# Altium PCB PCB1.PcbDoc
Units mil, origin at the board's own origin, x right, y up, seen from the top; angles counter-clockwise.
Board outline 1535 x 1330 mil, 2 copper layers (Top Layer, Bottom Layer); 30 components, 59 nets, 184 pads, 33 vias.
Unrouted connection lines stored in the file: 19.
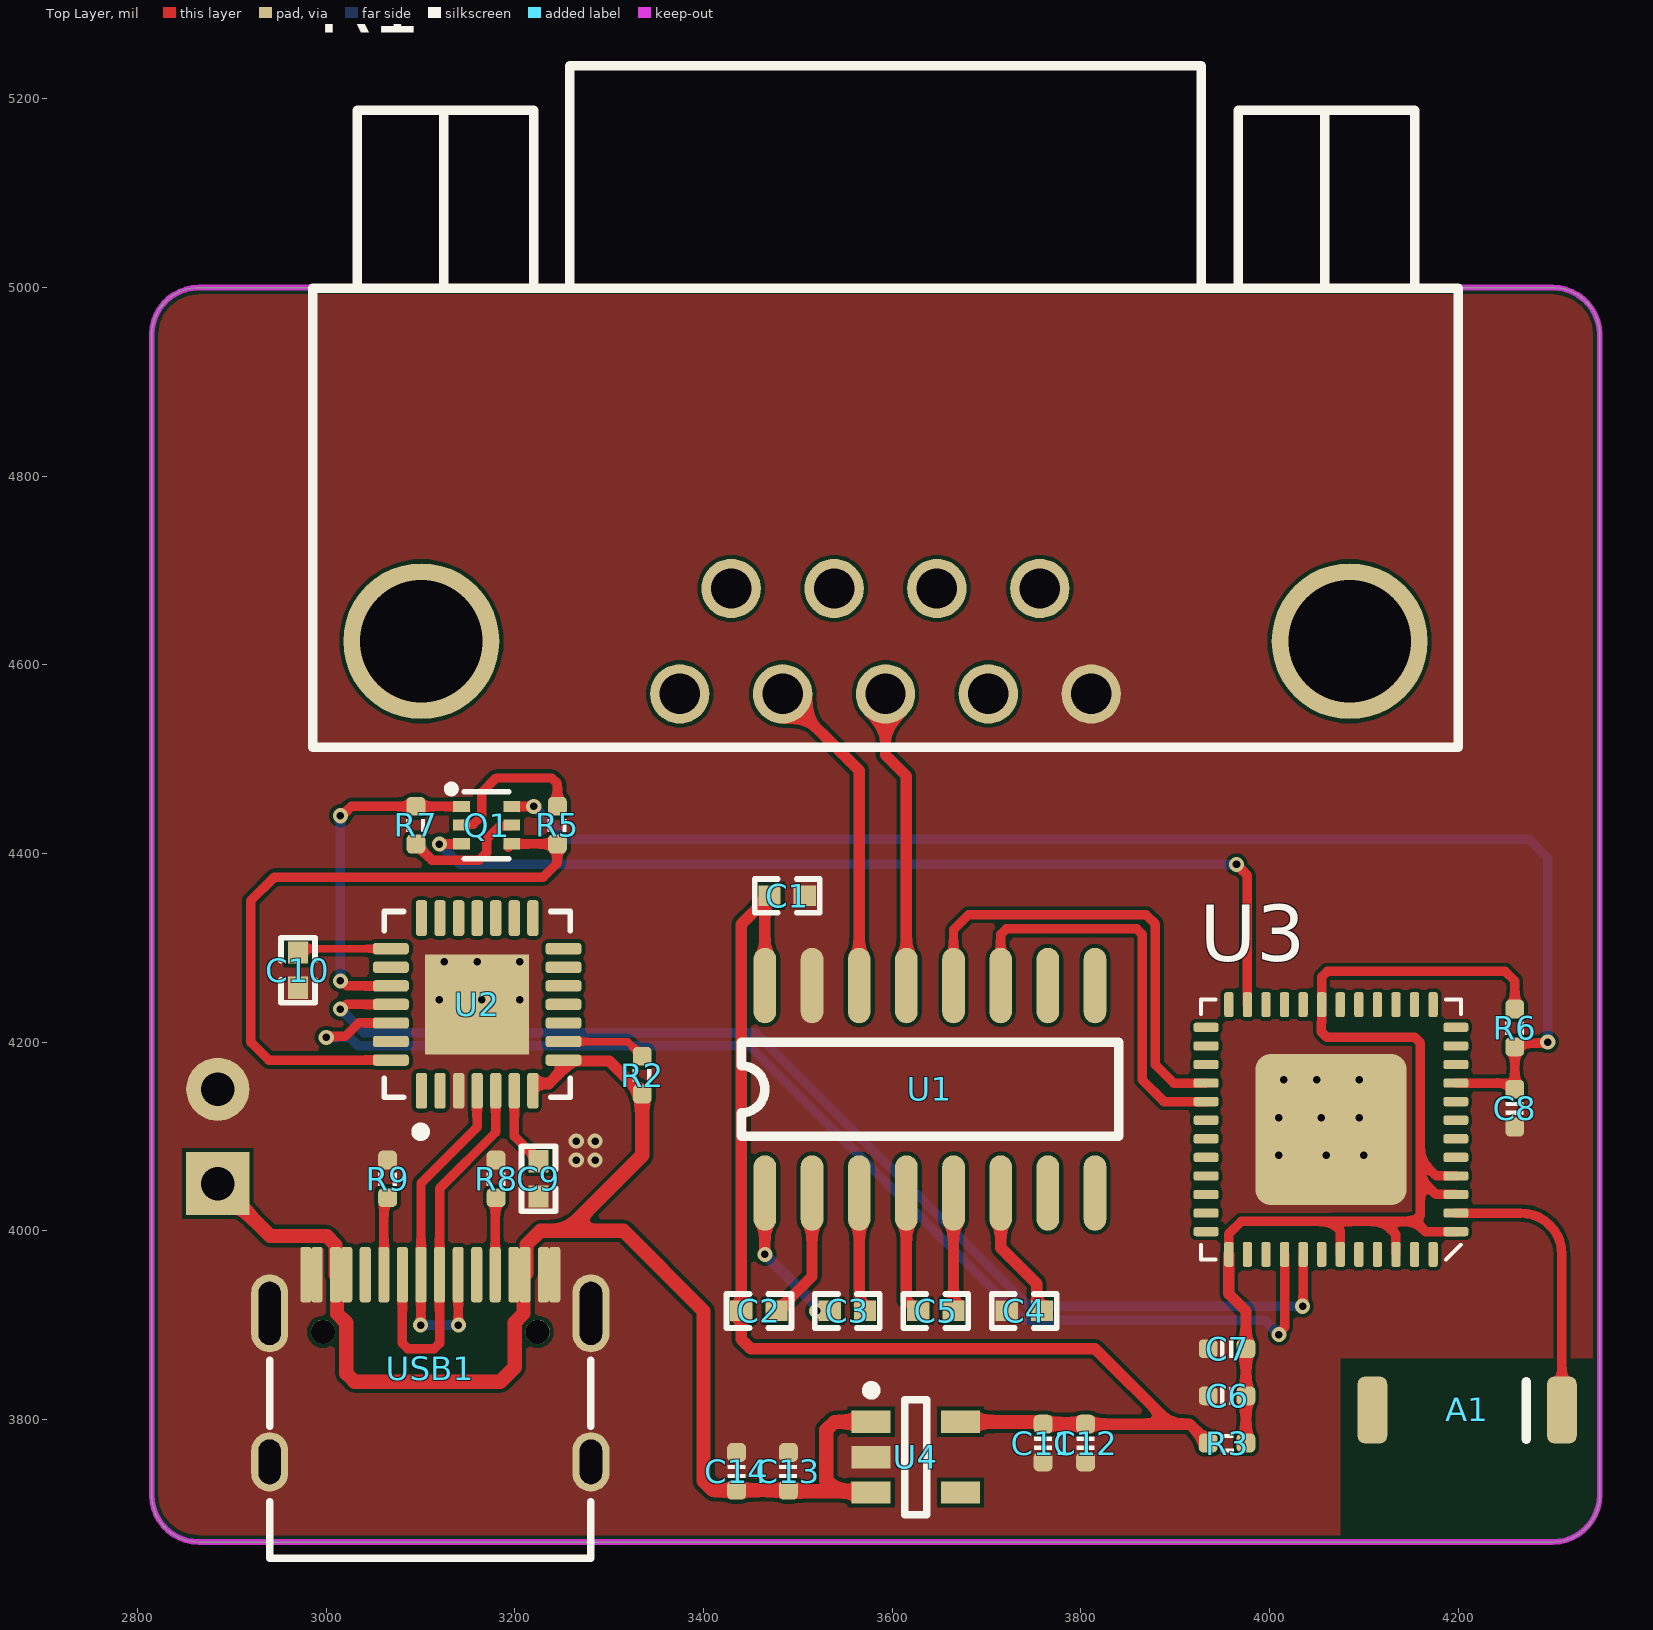
[diagram p0: Top Layer view]
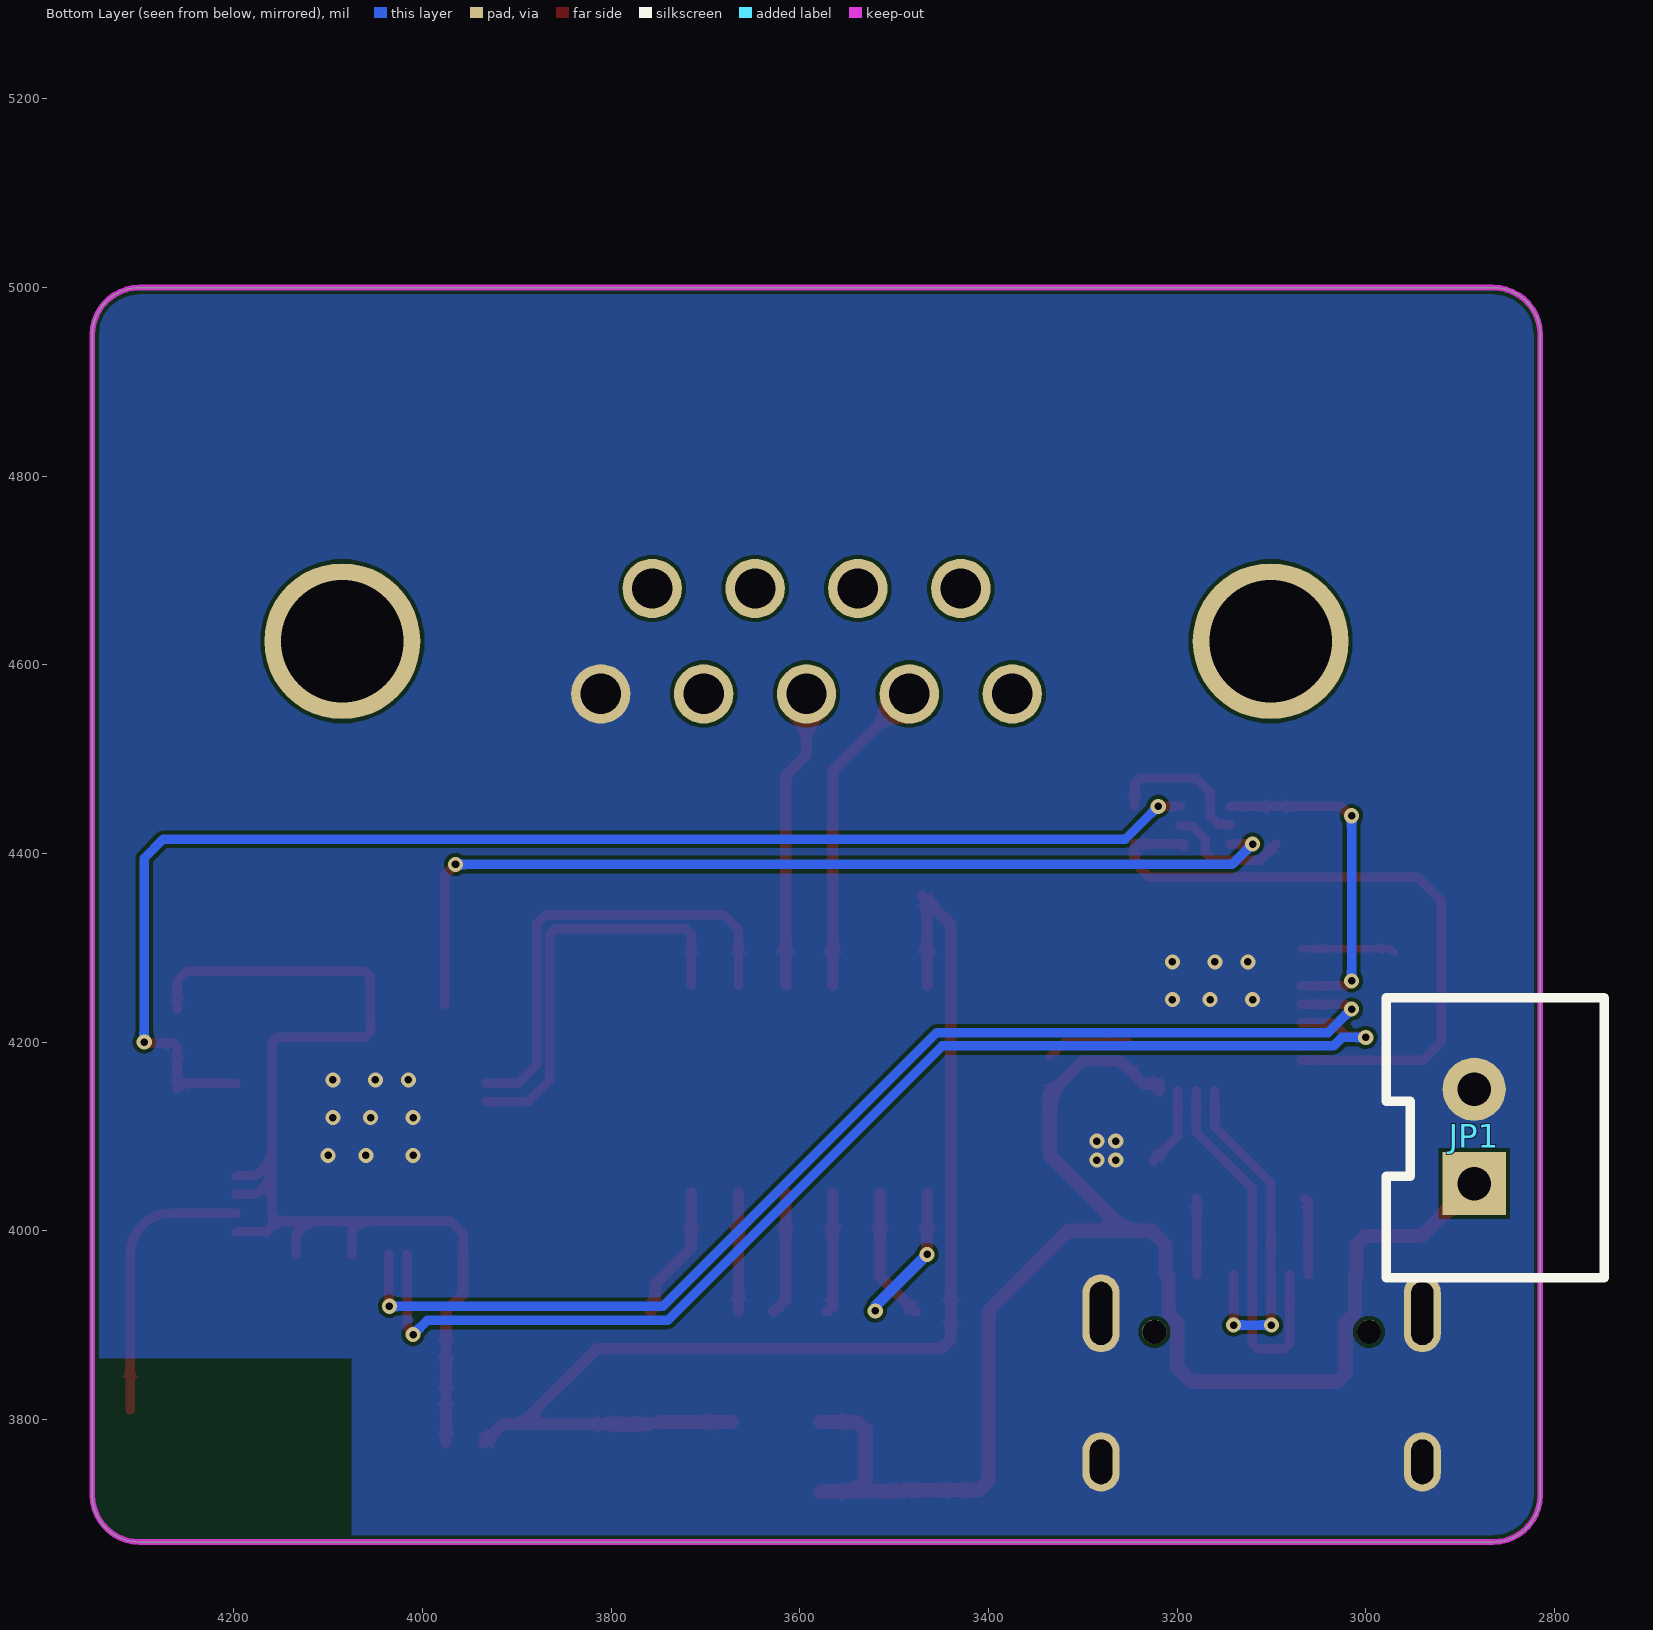
[diagram p1: Bottom Layer view, seen from below]
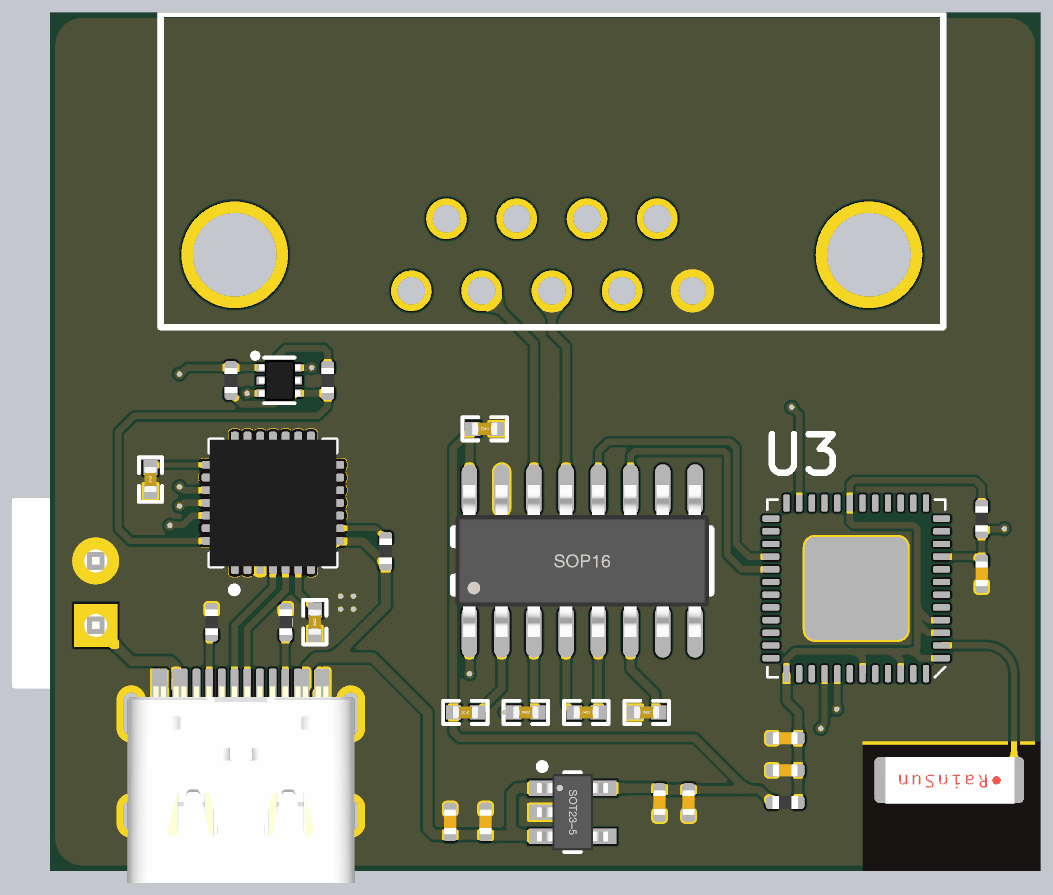
[diagram p2: 3D render of the assembled board from above, using the file's embedded part models]

## Layer stack, top to bottom
Top Solder: solder mask 0.4, Solder Resist, Dk 3.5
Top Layer: signal copper 1.4
Dielectric 1: dielectric 12.6, FR-4, Dk 4.8
Bottom Layer: signal copper 1.4
Bottom Solder: solder mask 0.4, Solder Resist, Dk 3.5

## Board outline
2815,3720 2815,4950 cw(c2865,4950) 2865,5000 4300,5000 cw(c4300,4950) 4350,4950 4350,3720 cw(c4300,3720) 4300,3670 2865,3670 cw(c2865,3720)

## Design rules (kind name [scope] priority, off if disabled: settings)
Clearance [All] p1: gap=4 ignorepadtopadclearanceinfootprint=FALSE
ComponentClearance [All] p1: gap=0 collisioncheckmode=3 verticalgap=0 showdistances=FALSE
DiffPairsRouting [All] p1: maxlimit=9 minlimit=9 mostfreqgap=9 toplayer_minwidth=4 toplayer_maxwidth=4 toplayer_prefwidth=4 bottomlayer_minwidth=4 bottomlayer_maxwidth=4 bottomlayer_prefwidth=4 maxuncoupledlength=500
FanoutControl Fanout_BGA [All] p1: bgadir=Out bgaviamode=Centered fanoutstyle=Auto fanoutdirection=Alternating viagrid=1 // Fanout_BGA (Default Rule)
HoleSize [All] p1: absolutevalues=TRUE maxlimit=10000 minlimit=8 maxpercent=80.000 minpercent=20.000
MinimumSolderMaskSliver [All] p1 off: minsoldermaskwidth=2
PlaneClearance [All] p1: clearance=8
PlaneConnect [All] p1: planeconnectstyle=Direct reliefexpansion=20 reliefentries=4 reliefconductorwidth=10 reliefairgap=10
PolygonConnect [All] p1: connectstyle=Direct reliefconductorwidth=10 reliefentries=4 polygonreliefangle="90 Angle" airgapwidth=10
RoutingVias [All] p1: holewidth=8 width=16 viastyle="Through Hole" minholewidth=6 minwidth=12 maxholewidth=28 maxwidth=50
SilkToSilkClearance [All] p1: silktosilkclearance=0
SilkToSolderMaskClearance [IsPad] p1: minsilkscreentomaskgap=0 clearancetoexposedcopper=TRUE
SolderMaskExpansion [All] p1: expansion=3 istentingtop=FALSE
Width [All] p1: maxlimit=10000 minlimit=4 preferedwidth=4
21 further rules are at their usual default settings.

## Components (designator, comment, footprint, x,y, rotation, side; value= is the part's Value field where it differs from the comment)
A1 "RAINSUN" ANT-Rainsun-AN5120 4210,3810 r180 top
C1 "1uf" C0402_M 3488.7,4355 r180 top
C2 "1uf" C0402_M 3458.7,3915 r180 top
C3 "1uf" C0402_M 3552.47,3915 r0 top
C4 "1uf" C0402_M 3740,3915 r0 top
C5 "1uf" C0402_M 3646.23,3915 r0 top
C6 "10uF" CAP_0402 3955,3825 r0 top value=0.1u
C7 "0.1uF" CAP_0402 3955,3875 r0 top value=0.1u
C8 "1uF" CAP_0402 4260,4130 r270 top value=0.1u
C9 "0.1uf" C0402_M 3225,4055 r90 top
C10 "0.1uf" C0402_M 2970,4276.3 r90 top
C11 "0.1uF" CAP_0402 3760,3775 r90 top value=0.1u
C12 "10uF" CAP_0402 3805,3775 r90 top value=0.1u
C13 "0.1uF" CAP_0402 3490,3745 r90 top value=0.1u
C14 "10uF" CAP_0402 3435,3745 r90 top value=0.1u
JP1 "HDR-1X2" XH2.54-LI-2P 2885,4100 r90 bottom
Q1 "BC847BVC-7" SOT563-6 3170,4430 r270 top
R1 "DB9-90-公" DSUB-TH_FDB0901-M0DB300K6KF 3592.87,4625.01 r180 top
R2 "10K" RES_0402 3335,4165 r90 top value=22R
R3 "0R" RES_0402 3955,3775 r0 top value=22R
R5 "12K" RES_0402 3245,4430 r90 top value=22R
R6 "10K" RES_0402 4260,4215 r270 top value=22R
R7 "12K" RES_0402 3095,4430 r270 top value=22R
R8 "5.1K" RES_0402 3180,4055 r270 top value=22R
R9 "5.1K" RES_0402 3065,4055 r90 top value=22R
U1 "MAX232" SO16 3640,4150 r90 top
U2 "9102" QFN-28 3160,4240 r90 top locked value=Value
U3 "ESP32_SIP" QFN-48_7X7 4065.16,4107.38 r180 top locked
U4 "LP2992 3V3" SOT23-5 3625,3760 r0 top
USB1 "Type-C" Type-C-TOP 3110.28,3854.21 r270 top

## Footprints (in the part's own frame and the unit in brackets; to place one, negate y for a bottom-side part, rotate by r counter-clockwise, add the part's x,y. Pads: shape width x height; smd on the part's side, far side on the other; paste and mask are expansions set on the pad)
ANT-Rainsun-AN5120 [mm] "选择焊盘"
  rrect50% 0.8x1.8 smd: 1(-2.54,0) ""(2.563,0)
  silkscreen extent -1.57,-0.76 -1.57,0.79, body extent -2.57,-0.91 2.54,0.94, height 1.32
C0402_M [mm] "贴片MLCC电容"
  rect 0.6x0.55 smd: 1(-0.475,0) 2(0.475,0)
  silkscreen extent -0.87,-0.46 0.87,0.46, body extent -0.5,-0.25 0.5,0.25, height 0.5
CAP_0402 [mil]
  rrect50% 20x20 smd: 1(-20,0) 2(20,0)
  silkscreen extent -6,-9 6,9, body extent -20,-10 20,10, height 20
DSUB-TH_FDB0901-M0DB300K6KF [mm]
  round 1.6 hole 1.09 mask+0.05: 1(-5.54,1.42) 2(-2.77,1.42) 3(0,1.42) 4(2.77,1.42) 5(5.54,1.42) 6(-4.155,-1.42) 7(-1.385,-1.42) 8(1.385,-1.42) 9(4.155,-1.42)
  round 4.2 hole 3.3 mask+0.05: 10(12.5,0) 11(-12.5,0)
  silkscreen extent -15.42,-15.5 15.42,2.85
QFN-28 [mil]
  rrect50% 38x12 smd mask+5: 1(-91.5,59.06) 2(-91.5,39.37) 3(-91.5,19.68) 4(-91.5,0) 5(-91.5,-19.68) 6(-91.5,-39.37) 7(-91.5,-59.06) 15(91.5,-59.06) 16(91.5,-39.37) 17(91.5,-19.68) 18(91.5,0) 19(91.5,19.68) 20(91.5,39.37) 21(91.5,59.06)
  rrect50% 12x38 smd mask+5: 8(-59.06,-91.5) 9(-39.37,-91.5) 10(-19.69,-91.5) 11(0,-91.5) 12(19.69,-91.5) 13(39.37,-91.5) 14(59.06,-91.5) 22(59.06,91.5) 23(39.37,91.5) 24(19.69,91.5) 25(0,91.5) 26(-19.69,91.5) 27(-39.37,91.5) 28(-59.06,91.5)
  rect 106.3x110.24 smd mask+3: 29(0,0)
  silkscreen extent -140,-98 98,98, body extent -99,-99 98,98, height 35
QFN-48_7X7 [mm]
  rrect50% 0.675x0.25 smd: 1(-3.363,2.75) 2(-3.363,2.25) 3(-3.363,1.75) 4(-3.363,1.25) 5(-3.363,0.75) 6(-3.363,0.25) 7(-3.363,-0.25) 8(-3.363,-0.75) 9(-3.363,-1.25) 10(-3.363,-1.75) 11(-3.363,-2.25) 12(-3.363,-2.75) 25(3.363,-2.75) 26(3.363,-2.25) 27(3.363,-1.75) 28(3.363,-1.25) 29(3.363,-0.75) 30(3.363,-0.25) 31(3.363,0.25) 32(3.363,0.75) 33(3.363,1.25) 34(3.363,1.75) 35(3.363,2.25) 36(3.363,2.75)
  rrect50% 0.25x0.675 smd: 13(-2.75,-3.363) 14(-2.25,-3.363) 15(-1.75,-3.363) 16(-1.25,-3.363) 17(-0.75,-3.363) 18(-0.25,-3.363) 19(0.25,-3.363) 20(0.75,-3.363) 21(1.25,-3.363) 22(1.75,-3.363) 23(2.25,-3.363) 24(2.75,-3.363) 37(2.75,3.363) 38(2.25,3.363) 39(1.75,3.363) 40(1.25,3.363) 41(0.75,3.363) 42(0.25,3.363) 43(-0.25,3.363) 44(-0.75,3.363) 45(-1.25,3.363) 46(-1.75,3.363) 47(-2.25,3.363) 48(-2.75,3.363)
  rrect20% 4.064x4.064 smd: 49(0,0)
  silkscreen extent -3.5,-3.5 3.5,3.5, body extent -3.5,-3.5 3.5,3.5, height 1
RES_0402 [mil]
  rrect50% 20x20 smd: 1(-20,0) 2(20,0)
  silkscreen extent -7,-10 7,10, body extent -20,-10 20,10, height 14
SO16 [mil] "封装库来自淘宝卖家 ID：黄晶宝石，其他均为盗版"
  oval 80x24 smd: 1(-110,175) 2(-110,125) 3(-110,75) 4(-110,25) 5(-110,-25) 6(-110,-75) 7(-110,-125) 8(-110,-175) 9(110,-175) 10(110,-125) 11(110,-75) 12(110,-25) 13(110,25) 14(110,75) 15(110,125) 16(110,175)
  silkscreen extent -50,-200 50,200, body extent -118,-197 118,197, height 75
SOT23-5 [mm] "SOT23, 5-Leads, Body 2.9x1.6mm, Pitch 0.95mm, IPC Medium Density                联系卖家 免费查找封装"
  rect 1.05x0.6 smd: 1(-1.2,0.95) 2(-1.2,0) 3(-1.2,-0.95) 4(1.2,-0.95) 5(1.2,0.95)
  silkscreen extent -1.32,-1.55 0.3,1.92, body extent -1.4,-1.5 1.4,1.5, height 1.15
SOT563-6 [mm] "联系卖家 免费查找封装"
  rect 0.3x0.45 smd: 1(-0.5,-0.675) 2(0,-0.675) 3(0.5,-0.675) 4(0.5,0.675) 5(0,0.675) 6(-0.5,0.675)
  silkscreen extent -1.07,-1.05 0.9,0.6, body extent -0.8,-0.8 0.8,0.83, height 0.58
Type-C-TOP [mm]
  round 0.65 hole 0.65: 0(-0.98,2.89) 0(-0.98,-2.89)
  oval 1.6x1 hole 0.6 slot 1.2 at 0 deg: 1(2.52,4.325) 2(2.52,-4.325)
  oval 2.1x1 hole 0.6 slot 1.7 at 0 deg: 3(-1.48,-4.325) 4(-1.48,4.325)
  rrect50% 1.5x0.3 smd: A1(-2.52,-3.35) A4(-2.52,-2.55) A5(-2.52,-1.25) A6(-2.52,-0.25) A7(-2.52,0.25) A8(-2.52,1.25) A9(-2.52,2.55) A12(-2.52,3.35) B1(-2.52,3.05) B4(-2.52,2.25) B5(-2.52,1.75) B6(-2.52,0.75) B7(-2.52,-0.75) B8(-2.52,-1.75) B9(-2.52,-2.25) B12(-2.52,-3.05)
  silkscreen extent -0.22,-4.33 5.12,4.33, body extent -2.57,-4.48 5.18,4.47, height 3.26
XH2.54-LI-2P [mm] "接插件，2P"
  rect 1.7x1.7 hole 0.9: 1(-1.27,0)
  round 1.7 hole 0.9: 2(1.27,0)
  silkscreen extent -3.81,-3.51 3.74,2.37, body extent -3.77,-3.3 3.77,2.4, height 7.05

## Part data
A1: library part ANT-Rainsun-AP5120
C1 C2 C3 C4 C5 R1 U1: BOM_Manufacturer Part=?, catid=20
  C1 C2 C3 C4 C5: sourceId=aYgasJ1jB, spicePre=C, timeStamp=1452930407
  R1: sourceId=I20wqkZTb, spicePre=R, timeStamp=1457058529
  U1: Contributor=SparkFun, sourceId=xvpHBTbtm, spicePre=U, timeStamp=1459220747
C6 C7 C8 C11 C12 C13 C14: library part 电容-0402, "Capacitor"
C9 C10: library part 1uf, BOM_Manufacturer Part=?, catid=20, sourceId=aYgasJ1jB, spicePre=C, timeStamp=1452930407
JP1: library part "Header 2", "2P接插件", BOM名称=2P接插件, 封装库来自淘宝卖家ID：黄晶宝石=其他店铺购入均为盗版封装库，请立即申请退款，本店现金奖励50~200元, 联系卖家，免费查找封装=唯一出售店铺网址https://shop463601444.taobao.com
R2 R3 R5 R6 R7 R8 R9: library part 电阻-0402, "Resistor"
U2: library part CP2102, "USB转TTL", MFG #1="SILICON LABS", PART DESC="SINGLE-CHIP USB TO UART BRIDGE, QFN28, RoHS.", PART NUMBER=CP2102, RefDes=RefDes, Type=DEV
U3: library part ESP32-PICO
U4: library part LP2992, "LDO"
USB1: library part USB-Type-C-TOP

## Via types
v1: diameter 16/16 (per signal layer), hole 8, Top Layer to Bottom Layer, tented both sides, 19 vias
v2: diameter 16, hole 8, Top Layer to Bottom Layer, tented both sides, 14 vias

## Nets (pads, with @x,y where several pads share a name; then routed paths per layer and width w, separated by ;. In a path a pad name is that pad's centre, name@x,y a point inside that pad or via, vN(x,y) a via of type N, cw(c..) or ccw(c..) an arc to the next point about the centre after c; other vN are vias at no path point)
3V3A: C6.2 C7.2 R3.2 R6.1 U3.1 U3.3 U3.4 U3.19 U3.37 U3.43 U3.46 | length 1249.9
  Top Layer w10: U3.37 3956.97,3975.08 3956.97,3996.97 3970,4010 4065,4010 ; U3.43 4075,4000 4065,4010 ; U3.46 4133.98,3975.08 4133.98,3996.02 4120,4010 ; U3.1 4165.03,3999.11 4154.14,4010 ; U3.3 4197.46,4038.56 4176.44,4038.56 4160,4055 ; U3.4 U3.4 4176.75,4058.25 4160,4075 ; R6.1 4260,4265 4250,4275 4061.17,4275 4055.32,4269.14 U3.19 4055.24,4239.69 4055.24,4221.09 4055,4220.86 4055,4210.86 4060.86,4205 4154.14,4205 4160,4199.14 4160,4075 ; 4065,4010 4120,4010 ; 4120,4010 4154.14,4010 ; 4154.14,4010 4160,4015.86 4160,4055 ; 4160,4055 4160,4075
  Top Layer w12: U3.37 3956.89,3932.95 3975,3914.84 C7.2 C6.2 R3.2
232RXD: R1.3 U1.13 | length 318.3
  Top Layer w12: R1.3 3592.87,4504.33 3615,4482.19 U1.13
232TXD: R1.4 U1.14 | length 342.7
  Top Layer w12: R1.4 3565,4487.9 U1.14
BOOT: Q1.3 U3.23 | length 1030.9
  Top Layer w10: v2(3120,4410) 3120.16,4410.16 3143.27,4410.16 Q1.3 ; v2(3965,4388.38) 3976.57,4376.8 U3.23
  Bottom Layer w10: v2(3120,4410) 3141.62,4388.38 v2(3965,4388.38)
CP_Rx: U2.25 U3.41 | length 1261.3
  Top Layer w10: v2(3015,4235) 3016.62,4235 3021.62,4240 U2.25 ; v2(4035,3920) 4035.63,3920.63 U3.41
  Bottom Layer w10: v2(3015,4235) 3040,4210 3455,4210 3745,3920 v2(4035,3920)
CP_Tx: U2.26 U3.40 | length 1302.8
  Top Layer w10: v2(3000,4205) 3001.15,4206.15 3020.33,4206.15 3034.5,4220.31 U2.26 ; v2(4010,3890) 4010,3891.62 4015.94,3897.57 U3.40
  Bottom Layer w10: v2(3000,4205) 3025.2,4205 3034.2,4196 3449,4196 3740,3905 3995,3905 v2(4010,3890)
DTR: Q1.4 R5.1 U2.28 | length 723.6
  Top Layer w10: U2.28 2939.06,4180.94 2920,4200 2920,4350 2945,4375 3230,4375 3244.84,4389.84 3244.84,4410.16 3196.74,4410.16 Q1.4 3193.63,4410.32 3192.72,4409.41 Q1.4@3192.72,4406.46
ESP_EN: C8.1 Q1.6 R6.2 U3.9 | length 1463.6
  Top Layer w10: Q1.6 3196.74,4449.85 3219.84,4449.85 v2(3220,4450) ; U3.9 4253.41,4156.59 C8.1 R6.2 4263.85,4198.85 4293.85,4198.85 v2(4295,4200)
  Bottom Layer w10: v2(3220,4450) 3255,4415 4275,4415 4295,4395 v2(4295,4200)
FLASH_CLK: U3.31
FLASH_CS: U3.25
FLASH_SD0: U3.27
FLASH_SD1: U3.33
FLASH_SD2: U3.30
FLASH_SD3: U3.32
GND: C1.1 C4.1 C6.1 C7.1 C8.2 C9.1 C10.1 C11.1 C12.1 C13.2 C14.2 JP1.2 R1.1 R8.1 R9.2 U1.15 U2.3 U2.29 U3.49 U4.2 USB1.1 USB1.2 USB1.3 USB1.4 USB1.A1 USB1.A12 USB1.B1 USB1.B12
  other v1: 3265,4075 3285,4075 4010,4080 4060,4080 4100,4080 3265,4095 3285,4095 4010,4120 4055,4120 4095,4120 4015,4160 4050,4160 4095,4160 3120,4245 3165,4245 3205,4245 3125,4285 3160,4285 3205,4285
GPIO2: U3.22
GPIO4: U3.24
GPIO5: U3.34
GPIO9: U1.12 U3.28 | length 494.7
  Top Layer w10: U1.12 3665,4319.14 3680.86,4335 3869.14,4335 3879,4325.14 3879,4176 3898.41,4156.59 U3.28
GPIO10: U1.11 U3.29 | length 440.5
  Top Layer w10: U1.11 3715,4314.14 3720.86,4320 3859.14,4320 3865,4314.14 3865,4160 3888.09,4136.91 U3.29
GPIO12: U3.18
GPIO13: U3.20
GPIO14: U3.17
GPIO15: U3.21
GPIO18: U3.35
GPIO19: U3.38
GPIO21: U3.42
GPIO22: U3.39
GPIO23: U3.36
GPIO25: U3.14
GPIO26: U3.15
GPIO27: U3.16
GPIO32: U3.12
GPIO33: U3.13
GPIO34: U3.10
GPIO35: U3.11
GPIO37: U3.6
GPIO38: U3.7
NetA1_1: A1.1 U3.2 | length 302.5
  Top Layer w10: U3.2 4266.2,4018.8 cw(c4266.2,3975) 4310,3975 A1.1
NetC2_1: C2.1 U1.2 | length 141.2
  Top Layer w12: C2.1 3478.39,3915 3515,3951.61 U1.2
NetC3_1: C3.1 U1.1 | length 147.8
  Top Layer w12: v2(3465,3975) U1.1
  Bottom Layer w12: v2(3465,3975) 3519.23,3920.77 3519.23,3915.77 v2(3520,3915)
NetC3_2: C3.2 U1.3 | length 128.1
  Top Layer w12: U1.3 3565,3920.18 3570.18,3915 C3.2
NetC4_2: C4.2 U1.6 | length 143.5
  Top Layer w12: U1.6 3715,3982 3753.17,3943.83 3753.17,3919.83 3758,3915 C4.2
NetC5_1: C5.1 U1.4 | length 130.8
  Top Layer w12: U1.4 3615,3926.55 3626.55,3915 C5.1
NetC5_2: C5.2 U1.5 | length 125
  Top Layer w12: C5.2@3664.97,3915.03 U1.5
NetC9_2: C9.2 U2.6 | length 85.4
  Top Layer w10: U2.6 3199.37,4100.31 3225,4074.68 C9.2
NetC10_2: C10.2 U2.22 | length 100.2
  Top Layer w8: C10.2 2974.06,4299.06 U2.22
NetQ1_2: Q1.2 R5.2 | length 163.5
  Top Layer w10: Q1.2 3144.34,4430.91 3155.91,4430.91 3165,4440 3165,4465 3180,4480 3239.14,4480 3245,4474.14 R5.2
NetQ1_5: Q1.5 R7.2 | length 132.2
  Top Layer w10: R7.2 3112,4393 3162.14,4393 3170,4400.86 3170,4415 3184.09,4429.09 3195.67,4429.09 Q1.5
NetR2_2: R2.2 U2.9 | length 90
  Top Layer w8: U2.9 3319.37,4200.63 R2.2
NetR8_2: R8.2 USB1.B5 | length 81.9
  Top Layer w10: USB1.B5 3179.17,4034.17 R8.2
NetR9_1: R9.1 USB1.A5 | length 83.2
  Top Layer w10: USB1.A5 3061.06,4031.06 R9.1
RTS: Q1.1 R7.1 U2.24 | length 363.4
  Top Layer w10: v2(3015,4265) 3016.62,4265 3021.94,4259.69 U2.24 ; v2(3015,4440) 3016.62,4440 3026.62,4450 R7.1 3095.16,4449.85 3143.28,4449.85 Q1.1
  Bottom Layer w10: v2(3015,4265) v2(3015,4440)
SENSOR_VN: U3.8
SENSOR_VP: U3.5
USB-PWR-DM: U2.5 USB1.A7 USB1.B7 | length 409.1
  Top Layer w10: USB1.B7 3080.75,3880.86 3086.61,3875 3114.26,3875 3120.12,3880.86 3120.12,4044.92 3179.68,4104.48 U2.5
USB-PWR-DP: U2.4 USB1.A6 USB1.B6 | length 366.9
  Top Layer w10: v2(3100,3900) 3100.22,3900.22 3100.22,3953.21 USB1.A6 3100.43,4050.46 3160,4110.03 U2.4 ; USB1.B6 3139.9,3953.33 3139.9,3900.1 v2(3140,3900)
  Bottom Layer w10: v2(3100,3900) v2(3140,3900)
VCC_3V3: C1.2 C2.2 C11.2 C12.2 R3.1 U1.16 U4.5 | length 1324
  Top Layer w12: C1.2@3464.19,4349.19 3440,4325 C2.2 3440,3885 3450,3875 3815,3875 3895,3795 ; U1.16 3465,4350.17 3469.83,4355 C1.2 ; C12.2 3895,3795 ; R3.1 3915,3795 3895,3795
  Top Layer w15: U4.5 3749.3,3797.4 ; C11.2 C12.2
VUSB: C13.1 C14.1 JP1.1 R2.1 U2.7 U2.8 U4.1 U4.3 USB1.A4 USB1.A9 USB1.B4 USB1.B9 | length 1655.3
  Top Layer w12: U2.7 3219.06,4156.03 3236.03,4156.03 3260,4180 3300,4180 R2.1
  Top Layer w15: JP1.1 2940.55,3994.45 3000.45,3994.45 3009.88,3985.02 USB1.A4 3011.48,3951.83 3011.48,3912.17 3021.21,3902.44 3021.21,3848.79 3025.01,3844.99 3030,3840 3184.52,3840 3199.76,3855.24 3199.76,3902.86 3209.07,3912.17 3209.07,3951.83 USB1.A9 3212.26,3955.02 3212.26,3985.3 3226.96,4000 3255,4000 ; R2.1 3335,4080 3255,4000 ; U4.3 3576.56,3723.8 3541.2,3723.8 ; U4.1 3538.79,3797.4 3530,3788.61 3530,3735 3541.2,3723.8 ; 3255,4000 3315,4000 3400,3915 3400,3735 3410,3725 C14.1 C13.1 3491.2,3723.8 3541.2,3723.8
pads on no net: A1. R1.2 R1.5 R1.6 R1.7 R1.8 R1.9 R1.10 R1.11 U1.7 U1.8 U1.9 U1.10 U2.1 U2.2 U2.10 U2.11 U2.12 U2.13 U2.14 U2.15 U2.16 U2.17 U2.18 U2.19 U2.20 U2.21 U2.23 U2.27 U3.26 U3.44 U3.45 U3.47 U3.48 U4.4 USB1.0 USB1.A8 USB1.B8

## Polygon pours and split planes (outlines as drawn)
GND on Bottom Layer "GND_L02_P001" (solid, remove dead copper, pour order 1): 2765,5100 4395,5100 4680,4815 4555,4690 4555,3640 2750,3640 2510,3400
GND on Top Layer "GND_L01_P000" (solid, remove dead copper, pour order 0): 2695,5035 2700,5030 4570,5030 4570,3485 4595,3460 4560,3425 2630,3425

## Keep-outs
Keep-Out Layer:
  the board outline again, w6

## Other copper
Top Layer:
  pour cut-out: 4075,3865 4075,3645 4355,3645 4355,3865
Bottom Layer:
  pour cut-out: 4075,3865 4075,3645 4355,3645 4355,3865

## Silkscreen, mask and mechanical layers (free items; w line width, h text height)
Top Solder:
  region: 4355,3645 4355,3870 4075,3870 4075,3645
Bottom Solder:
  region: 4355,3645 4355,3865 4075,3865 4075,3645
Mechanical 1:
  the board outline again, w6